# Altium PCB L-LRMAM36-FANN4-DK01_V03_位号图.PcbDoc (part 2 of 3)
Units mm, origin at the board's own origin, x right, y up, seen from the top; angles counter-clockwise.
Board outline 54 x 90 mm, 4 copper layers (Top Layer, GND, VCC, Bottom Layer), stack 1.59 mm thick; 276 components, 168 nets, 833 pads, 804 vias.
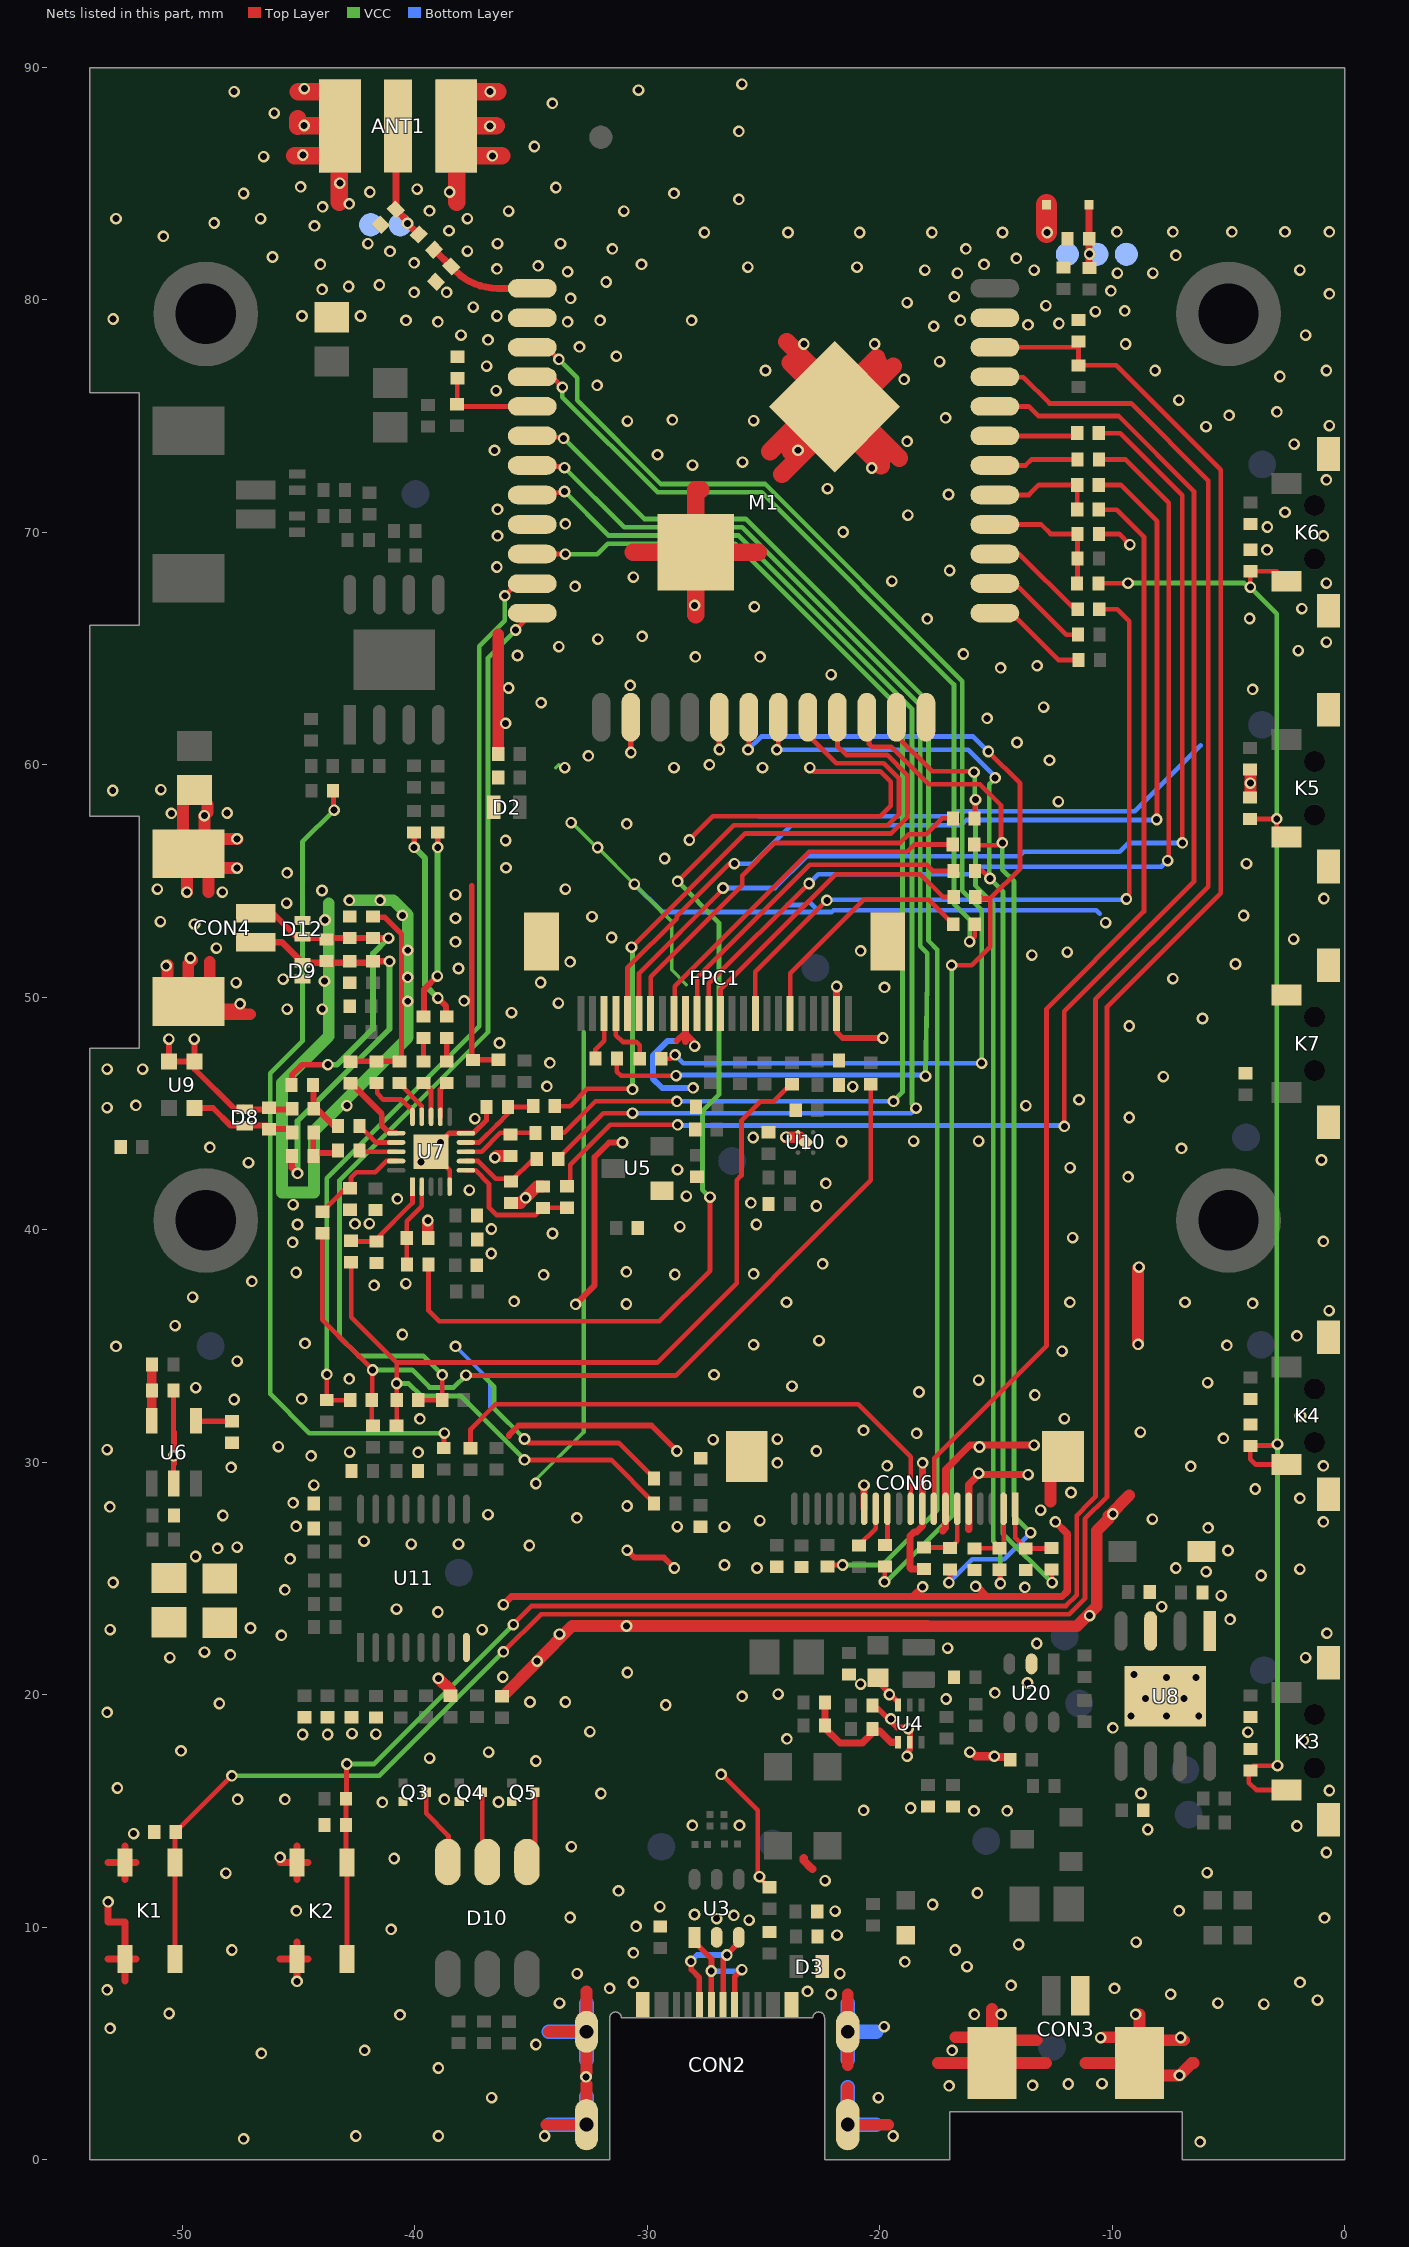
[diagram p4: the nets of this part, all layers, seen from the top]

## Via types
v1: diameter 0.5, hole 0.3, Top Layer to Bottom Layer, tented both sides, 804 vias

## Nets (pads, with @x,y where several pads share a name; then routed paths per layer and width w, separated by ;. In a path a pad name is that pad's centre, name@x,y a point inside that pad or via, vN(x,y) a via of type N, cw(c..) or ccw(c..) an arc to the next point about the centre after c; other vN are vias at no path point) (continued)
AUD_N: C57.1 R51.2 | length 8.2
  Top Layer w0.254: R51.2@-39.631,49.169 -39.606,49.194 -39.606,50.348 v1@-39.04,50.913 ; v1(-39.019,56.455) C57.1@-39.019,57.09
  VCC w0.254: v1(-39.032,50.913) -39.032,56.441 v1(-39.019,56.455)
AUD_P: C58.1 R54.2 | length 8.5
  Top Layer w0.254: v1(-40.032,56.449) C58.1@-40.032,57.084 ; v1(-39.016,49.972) -38.656,49.612 -38.656,49.194 R54.2@-38.631,49.169
  VCC w0.254: v1(-40.032,56.449) -39.562,55.979 -39.562,50.518 v1(-39.016,49.972)
BOOT: C23.2 K2.3 K2.4 M1.33 R37.2 | length 104.2
  Top Layer w0.203: K2.3@-42.925,8.625 K2.4@-42.925,12.775 -42.964,12.814 R37.2@-42.964,15.523 -42.945,15.542 -42.945,16.999 v1(-42.926,17.018) ; v1@-35.776,23.025 -34.982,23.819 -11.993,23.819 -11.532,24.281 -11.532,27.706 -11.237,28.001 ; M1.33@-15.05,76.69 -15.034,76.674 -13.826,76.674 -12.7,75.548 -9.187,75.548 -5.871,72.232 -5.871,54.765 -10.726,49.91 -10.726,28.517 -11.239,28.004
  VCC w0.203: v1(-42.926,17.018) -41.757,17.018 v1(-35.763,23.012)
Camera_RST: FPC1.6 R17.1 | length 10.5
  Top Layer w0.203: FPC1.6@-23.858,49.3 -23.858,51.038 -20.694,54.202 -17.898,54.202 R17.1@-16.839,53.143
CHIP_PU: C19.2 C22.2 K1.3 K1.4 M1.34 R20.1 | length 112.3
  Top Layer w0.203: K1.3@-50.325,8.625 K1.4@-50.325,12.775 -50.325,14.064 C19.2@-50.292,14.097 v1(-47.879,16.51) ; v1(-36.195,21.844) -34.576,23.463 -11.846,23.463 -11.176,24.133 -11.176,27.559 -10.227,28.508 -10.227,49.59 -5.334,54.483 -5.334,72.688 -9.832,77.186 R20.1@-11.463,77.186 -11.456,77.194 C22.2@-11.456,78.214 ; M1.34@-15.05,77.96 C22.2@-11.528,77.96
  VCC w0.203: v1(-47.879,16.51) -41.529,16.51 v1(-36.195,21.844)
CODEC_I2S0_BCLK: C51.2 R45.1 U7.6 | length 5.9
  Top Layer w0.203: U7.6@-37.806,42.556 -37.393,42.556 -36.815,41.979 -36.815,41.026 -36.81,41.02 -36.81,40.946 -36.499,40.636 -34.799,40.636 C51.2@-34.492,40.942 -34.488,40.947 R45.1@-33.45,40.947
CODEC_I2S0_DIN: C54.2 R47.1 U7.7 | length 3.8
  Top Layer w0.203: U7.7@-37.806,42.956 -37.285,42.956 -36.521,42.193 -36.044,42.193 C54.2@-35.918,42.067 ; C54.2@-35.873,42.077 -34.916,43.035 R47.1@-34.763,43.035
CODEC_I2S0_DOUT: C56.2 R49.1 U7.9 | length 3.7
  Top Layer w0.203: U7.9@-37.806,43.756 -37.238,43.756 -36.47,44.525 -36.459,44.525 -35.998,44.985 C56.2@-35.998,45.283 -34.944,45.283 R49.1@-34.91,45.316
CODEC_I2S0_LRCK: C52.2 R48.1 U7.8 | length 3.3
  Top Layer w0.203: U7.8@-37.806,43.356 -37.135,43.356 -36.322,44.169 -35.886,44.169 R48.1@-34.818,44.169
CODEC_I2S0_MCLK: C50.2 R43.1 U7.2 | length 3.6
  Top Layer w0.203: R43.1@-40.337,38.513 -40.353,38.529 C50.2@-40.353,39.638 -40.353,40.371 -39.706,41.018 U7.2@-39.706,41.857
D0: FPC1.19 R106.1 | length 47.1
  Top Layer w0.203: FPC1.19@-30.358,49.3 -30.358,51.033 -26.747,54.643 v1(-26.747,54.705) ; R106.1@-10.58,74.269 -9.657,74.269 -6.985,71.597 v1(-6.985,56.642)
  Bottom Layer w0.203: v1(-26.747,54.705) -24.513,54.705 -23.152,56.066 -14.011,56.066 -13.816,56.261 -9.682,56.261 -9.301,56.642 v1(-6.985,56.642)
D1: FPC1.21 R107.1 | length 2.7
  Top Layer w0.203: FPC1.21@-31.358,49.3 -31.358,48.376 -31.063,48.081 -30.477,48.081 -30.328,47.932 R107.1@-30.328,47.358
D2: FPC1.22 R108.1 | length 2.1
  Top Layer w0.203: R108.1@-32.238,47.362 -32.238,47.75 -31.858,48.131 FPC1.22@-31.858,49.3
D2_N: CON2.A7 CON2.B7 U3.3 | length 6.5
  Top Layer w0.241: v1(-28.13,8.531) -28.109,8.51 -28.109,8.169 -27.769,7.829 CON2.B7@-27.769,7.078 ; CON2.A7@-26.75,6.65 -26.73,6.67 -26.73,8.651 v1(-26.58,8.802) -26.58,8.827 -26.071,9.335 U3.3@-26.071,9.561
  Bottom Layer w0.241: v1(-28.13,8.531) -27.86,8.802 v1(-26.58,8.802)
D2_P: CON2.A6 CON2.B6 U3.1 | length 5.8
  Top Layer w0.241: U3.1@-27.971,9.561 -27.971,9.361 -27.244,8.634 -27.244,8.182 v1@-27.247,8.178 ; v1@-27.259,8.11 v1@-27.259,8.169 ; v1(-27.253,8.11) -27.25,8.107 CON2.A6@-27.25,6.65 ; CON2.B6@-26.25,7.059 -26.25,7.865 v1@-25.943,8.172 ; v1@-25.96,8.172 v1@-25.943,8.172 ; v1(-25.937,8.172) v1@-25.943,8.172
  Bottom Layer w0.241: v1(-27.253,8.11) -25.999,8.11 v1(-25.937,8.172)
D3: FPC1.20 R109.1 | length 43.5
  Top Layer w0.203: FPC1.20@-30.858,49.3 -30.858,51.265 -28.734,53.389 -28.734,53.496 -26.483,55.747 v1(-26.256,55.747) v1@-26.312,55.69 ; R109.1@-10.585,72.041 -9.631,72.041 -8.072,70.482 -8.072,57.669 v1(-8.089,57.652)
  Bottom Layer w0.203: v1(-26.256,55.747) -25.473,55.747 -23.813,57.407 -16.497,57.407 -16.276,57.628 -8.113,57.628 v1(-8.089,57.652)
D4: FPC1.18 R16.1 | length 17.7
  Top Layer w0.203: FPC1.18@-29.858,49.3 -29.858,50.882 -25.915,54.825 -25.915,55.238 -24.511,56.642 -19.133,56.642 -18.759,57.016 -18.008,57.016 -17.324,57.7 R16.1@-16.85,57.7
D5: FPC1.16 R9.1 | length 15.7
  Top Layer w0.203: FPC1.16@-28.858,49.3 -28.825,49.333 -28.825,50.481 -23.045,56.261 -18.832,56.261 -18.521,56.571 R9.1@-16.863,56.571
D6: FPC1.14 R2.1 | length 14.7
  Top Layer w0.203: FPC1.14@-27.858,49.3 -27.858,50.861 -23.019,55.7 -17.976,55.7 -17.708,55.432 -16.834,55.432 R2.1@-16.83,55.437
D7: FPC1.12 R1.1 | length 13.5
  Top Layer w0.203: FPC1.12@-26.858,49.3 -26.858,50.331 -21.899,55.29 -18.256,55.29 -17.281,54.315 R1.1@-16.822,54.315
GND: ANT1.2 ANT1.3 ANT1.4 ANT1.5 ANT2.2 C1.1 C2.1 C8.1 C9.1 C10.1 C11.1 C12.1 C14.1 C15.1 C16.1 C17.1 C19.1 C20.1 C21.1 C22.1 C23.1 C24.1 C25.1 C26.1 C27.1 C28.1 C32.1 C33.1 C34.1 C44.2 C53.1 C55.1 C59.2 C66.1 C67.1 C68.1 C69.2 C70.1 C71.2 C74.2 C75.2 C76.2 C77.2 C78.1 C79.1 C80.1 C82.1 C83.1 C84.2 C85.1 C88.2 C89.1 C92.2 CON2.A1 CON2.A12 CON2.B1 CON2.B12 CON2.H1 CON2.H2 CON2.H3 CON2.H4 CON3.0 CON3.2 CON6.0 CON6.5 CON6.7 CON6.9 CON6.14 D2.A D3.A D6.A FPC1.2 FPC1.15 FPC1.25 FPC1.26 K1.1 K1.2 K2.1 K2.2 K3.0 K4.0 K5.0 K6.0 K7.0 K7.1 LED1.K M1.2 M1.9 M1.14 M1.17 M1.24 M1.35 Q3.E Q4.E Q5.E R3.1 R4.1 R12.1 R26.1 R28.2 R29.1 R31.1 R63.2 R66.1 R77.1 R79.1 R81.1 R85.1 R88.2 R89.1 R115.1 TP3.1 TP5.1 TP7.1 U3.2 U4.2 U4.6 U5.1 U8.0 U8.1 U8.3 U10.0 U10.2 U11.8 U20.2 | length 350.2
  Top Layer w0.2: v1(-26.825,16.575) -26.8,16.575 -25.25,15.025 -25.25,13.711 -25.248,13.708 -25.248,13.292 -25.25,13.29 -25.25,12.25 v1(-25.175,12.175) -25.189,12.175 -25.207,12.157 C12.1@-24.8,11.75
  Top Layer w0.203: v1(-28.194,56.769) -27.178,57.785 -19.983,57.785 -19.535,58.233 -19.535,59.267 -19.983,59.715 -22.851,59.715 v1(-23.014,59.878) ; C44.2@-10.574,69.933 -9.709,69.933 -9.247,69.47 v1(-9.243,69.47)
  Top Layer w0.241: M1.14@-30.715,62.05 -30.715,60.536 v1(-30.712,60.533) ; -28.739,48.128 -28.739,48.133 -28.387,48.485 -28.358,48.455 v1@-28.036,48.133 ; M1.17@-26.905,62.05 -26.905,60.663 v1(-26.902,60.66) ; FPC1.2@-21.858,49.3 -21.858,48.506 -21.6,48.248 v1(-19.868,48.248) ; v1(-21.858,50.464) v1@-21.822,50.5 ; R12.1@-20.312,19.4 -20.075,19.4 -19.264,18.589 -18.829,18.589 v1(-18.78,18.54) ; C14.1@-20.084,20.554 -19.214,19.684 U4.6@-19.214,19.552 ; v1(-18.826,17.351) -18.9,17.425 -18.8,17.525 -18.8,17.55 -18.714,17.636 U4.2@-18.714,17.952 ; -18.697,17.64 v1@-18.697,18.615 ; v1@-15.125,17.325 v1@-15.075,17.325 ; v1@-15.076,17.326 v1(-15.076,17.351) ; C1.1@-14.512,17.325 C1.1@-14.387,17.2
  Top Layer w0.254: -35.946,31.133 -35.946,31.176 -35.543,31.579 -29.827,31.579 v1(-28.73,30.481) ; v1(-33.085,36.794) -32.271,37.609 -32.271,43.131 -31.646,43.755 v1(-31.07,43.755) ; v1(-30.874,26.213) -30.555,25.894 -29.285,25.894 v1(-28.842,25.451)
  Top Layer w0.3: -53.2,8.625 K1.1@-52.475,8.625 ; v1(-53.2,11.085) -53.2,10.212 -52.475,10.212 K1.1@-52.475,8.625 ; -53.2,12.775 K1.2@-52.475,12.775 ; -52.475,7.675 K1.1@-52.475,8.4 ; -52.475,12.05 K1.2@-52.475,12.775 ; -52.475,13.5 K1.2@-52.475,12.775 ; -52.007,8.625 K1.1@-52.475,8.625 ; -52.007,12.775 K1.2@-52.475,12.775 ; -45.8,8.625 K2.1@-45.075,8.625 ; v1@-45.8,12.775 K2.2@-45.075,12.775 ; v1@-45.075,7.9 K2.1@-45.075,8.625 ; -45.075,9.35 K2.1@-45.075,8.625 ; -45.075,12.05 K2.2@-45.075,12.775 ; -45.075,13.5 K2.2@-45.075,12.775 ; -44.607,8.625 K2.1@-45.075,8.625 ; -44.607,12.775 K2.2@-45.075,12.775 ; -28.358,48.097 -28.358,48.455 FPC1.15@-28.358,49.3 ; FPC1.2@-21.858,49.3 v1(-21.858,50.464)
  Top Layer w0.305: v1(-36.195,23.876) -35.846,24.225 -15.387,24.225 ; v1(-20.683,29.015) -20.679,29.011 -20.679,28.002 CON6.14@-20.675,27.998 ; -18.542,24.257 v1(-18.161,24.638) ; v1(-18.161,29.972) -18.161,27.258 -18.425,26.994 -18.52,26.994 -18.698,26.815 -18.698,25.445 -18.662,25.408 C59.2@-18.094,25.408 ; -17.292,27.051 -17.175,27.168 CON6.7@-17.175,27.998 -17.175,29.674 -16.114,30.735 v1(-13.363,30.735) ; -16.175,27.097 CON6.5@-16.175,27.998 -16.175,29.037 -15.747,29.465 v1(-13.617,29.465) ; v1@-15.825,24.663 -15.387,24.225 ; v1(-12.446,27.432) -11.938,26.924 -11.938,24.449 -12.162,24.225 -15.387,24.225
  Top Layer w0.35: -23.275,12.975 -23.275,12.862 -22.986,12.573 -22.973,12.573 -22.9,12.5 ; v1(-16.125,17.525) -16.05,17.525 -15.876,17.351 v1(-15.076,17.351) ; v1@-15.075,17.325 C1.1@-14.512,17.325
  Top Layer w0.5: -34.359,1.5 CON2.H3@-32.62,1.5 -32.62,3.239 ; -34.232,5.5 CON2.H2@-32.62,5.5 ; v1@-32.62,3.761 CON2.H2@-32.62,5.5 ; -32.62,7.239 CON2.H2@-32.62,5.5 ; CON2.H2@-32.493,5.5 CON2.H2@-32.62,5.5 ; v1(-24.039,43.983) -23.425,43.983 U10.0@-23.196,43.754 ; CON2.H4@-21.38,1.373 CON2.H4@-21.38,1.5 ; -21.38,3.112 CON2.H4@-21.38,1.5 ; -21.38,4.064 CON2.H1@-21.38,5.5 -21.38,7.112 ; -19.641,1.5 CON2.H4@-21.38,1.5
  Top Layer w0.508: v1(-38.989,20.701) -38.468,20.18 C67.1@-38.468,20.175 ; C8.1@-36.418,60.475 -36.418,65.62 ; C68.1@-36.252,19.934 -36.244,19.943 -36.206,19.943 -34.742,21.407 v1(-34.742,21.445) -33.232,22.955 v1(-30.899,22.955) -17.959,22.955 -17.949,22.945 -11.521,22.945 -10.668,23.798 -10.668,27.051 -10.16,27.559 -10.16,27.686 -9.271,28.575 ; M1.9@-35.006,70.396 M1.9@-34.95,70.34 ; -17.502,4.15 CON3.0@-15.175,4.15 ; -16.756,5.261 CON3.0@-15.175,5.261 ; CON3.0@-15.59,5.13 CON3.0@-15.175,5.13 ; -15.175,6.477 CON3.0@-15.175,5.261 ; CON3.0@-14.429,5.261 CON3.0@-15.175,5.261 ; -13.263,5.13 CON3.0@-15.175,5.13 ; -12.848,4.15 CON3.0@-15.175,4.15 ; -12.656,28.3 -12.656,29.718 CON6.0@-12.125,30.248 ; -11.152,4.15 CON3.0@-8.825,4.15 ; v1@-10.406,5.261 CON3.0@-8.825,5.261 ; CON3.0@-9.24,5.13 CON3.0@-8.825,5.13 ; v1(-8.89,35.074) -8.89,38.352 v1(-8.853,38.389) ; v1@-8.825,6.245 CON3.0@-8.825,5.261 ; CON3.0@-8.079,5.261 CON3.0@-8.825,5.261 ; v1@-6.913,5.13 CON3.0@-8.825,5.13 ; -6.498,4.15 -6.58,4.15 v1(-7.107,3.623) -8.298,3.623 CON3.0@-8.825,4.15 ; C33.1@-4.058,58.723 v1(-4.058,59.211) R28.2@-4.058,59.712 ; CON3.0@-15.175,4.15 CON3.0@-15.175,5.13 ; CON3.0@-15.175,5.13 CON3.0@-15.175,5.261 ; CON3.0@-8.825,4.15 CON3.0@-8.825,5.13 ; CON3.0@-8.825,5.13 CON3.0@-8.825,5.261
  Top Layer w0.762: -45.171,86.203 ANT1.2@-43.36,86.203 ; -45.036,87.475 -45.036,87.783 ; -45.011,88.951 ANT1.2@-43.2,88.951 ; v1@-44.933,87.492 ANT1.2@-43.122,87.492 ; -43.255,84.198 ANT1.2@-43.255,86.009 ; ANT1.3@-38.328,87.492 -36.517,87.492 ; ANT1.3@-38.25,88.951 -36.439,88.951 ; -38.195,84.198 ANT1.3@-38.195,86.009 ; ANT1.3@-38.09,86.203 v1(-36.673,86.203) -36.279,86.203 ; -30.614,69.15 M1.2@-27.925,69.15 ; -27.925,66.461 M1.2@-27.925,69.15 ; -27.711,71.839 -27.925,71.839 M1.2@-27.925,69.15 ; -25.236,69.15 M1.2@-27.925,69.15 ; -24.723,73.482 M1.2@-22.821,75.383 ; -24.208,72.502 M1.2@-22.307,74.403 ; -24.001,78.204 M1.2@-22.1,76.302 ; -23.851,73.499 M1.2@-21.95,75.4 ; -23.851,77.301 M1.2@-21.95,75.4 ; M1.2@-22.032,75.599 -20.13,77.5 ; M1.2@-21.854,74.769 -19.952,72.868 ; M1.2@-21.742,75.141 -19.841,73.24 ; M1.2@-21.329,75.242 -19.428,77.144 ; M1.2@-21.062,75.106 -19.16,73.204 ; -20.049,77.301 M1.2@-21.95,75.4 ; v1@-12.83,82.9 v1(-12.805,82.9)
  Top Layer w0.9: v1@-12.83,82.9 ANT2.2@-12.83,84.1
  VCC w0.152: v1(-34.798,29.083) -34.798,29.239 -32.735,31.302 ; -33.94,59.874 -33.809,60.005 ; v1(-33.278,57.516) -33.245,57.516 -32.176,56.447 v1(-32.143,56.447) v1(-30.565,54.869) -28.956,53.26 -28.956,51.181 -28.321,50.546
  VCC w0.203: -32.735,31.302 -32.735,48.498
  Bottom Layer w0.152: v1(-38.254,34.986) -36.888,33.62 cw(c-37.011,33.497) -36.837,33.497 cw(c-36.993,33.34) -36.772,33.34 -36.772,32.369
  Bottom Layer w0.203: v1(-30.565,54.869) -29.367,53.671 -22.608,53.671 ; -25.224,57.785 -16.933,57.785 -16.716,58.001 -9.033,58.001 -6.2,60.834 ; -23.98,53.975 -23.213,53.975 -23.063,54.126 -22.608,53.671 ; -10.541,53.594 -10.695,53.748 -21.994,53.748 -22.071,53.671 -22.608,53.671
  Bottom Layer w0.254: -28.739,48.128 -29.124,48.128 -29.763,47.489 -29.763,46.501 -29.359,46.096 -28.038,46.096 v1(-28.033,46.101)
  Bottom Layer w0.635: -34.232,1.5 CON2.H3@-32.62,1.5 -32.62,2.71 ; -34.232,5.5 CON2.H2@-32.62,5.5 ; -32.62,4.29 CON2.H2@-32.62,5.5 ; -32.62,6.71 CON2.H2@-32.62,5.5 ; -21.38,3.112 CON2.H4@-21.38,1.5 -20.17,1.5 ; -21.38,4.29 CON2.H1@-21.38,5.5 ; -21.38,6.71 CON2.H1@-21.38,5.5 ; -20.17,5.5 CON2.H1@-21.38,5.5
  other v1: -6.223,0.762 -47.371,0.889 -42.545,1.016 -38.989,1.016 -34.417,1.016 -19.431,1.016 -36.703,2.667 -20.066,2.667 -17.018,3.175 -13.426,3.194 -11.895,3.25 -10.445,3.266 -32.639,3.556 -38.989,3.937 -46.609,4.572 -42.164,4.699 -16.891,4.699 -34.798,4.953 -10.501,5.243 -7.059,5.251 -53.113,5.649 -19.812,5.715 -40.64,6.223 -15.931,6.245 -14.783,6.245 -8.997,6.245 -50.573,6.284 -3.478,6.69 -33.782,6.731 -5.461,6.731 -1.171,6.859 -22.098,7.112 -7.493,7.112 -23.114,7.239 -53.24,7.3 -31.623,7.366 -9.906,7.366 -14.351,7.493 -30.607,7.62 -1.925,7.625 -45.076,7.664 -33.02,8.001 -21.717,8.001 -16.25,8.3 -18.923,8.509 -30.607,8.89 -47.879,9.017 -16.764,9.017 -14.025,9.25 -8.975,9.35 -21.844,9.652 -41.021,9.906 -30.48,10.033 -25.621,10.297 -27.024,10.366 -0.869,10.4 -33.326,10.414 -26.277,10.509 -27.973,10.545 -21.924,10.684 -45.1,10.7 -7.125,10.7 -29.461,10.884 -17.725,10.975 -15.808,11.469 -31.242,11.557 -22.35,12 -48.133,12.319 -5.916,12.342 -40.894,12.954 -45.8,13 -0.79,13.209 -33.274,13.462 -52.103,14.021 -8.475,14.2 -2.06,14.352 -28.067,14.379 -26.035,14.379 -15.95,15 -14.525,15 -20.7,15.025 -18.675,15.125 -41.402,15.367 -36.403,15.385 -47.625,15.494 -45.593,15.494 -38.735,15.494 -32.004,15.748 -8.763,15.748 -0.663,15.876 -52.799,15.984 -34.798,17.145 -39.37,17.272 -36.83,17.526 -50.065,17.587 -1.778,18.034 -24,18.1 -44.831,18.288 -43.755,18.288 -41.678,18.3 -42.709,18.324 -4.171,18.385 -32.476,18.407 -9.975,18.575 -19.523,18.958 -9.201,19.08 -7.677,19.08 -6.28,19.08 -53.24,19.238 -29.21,19.558 -48.414,19.619 -35.052,19.685 -33.528,19.685 -17.145,19.812 -8.566,19.842 -6.915,19.842 -25.925,19.925 -19.589,20.009 -24.375,20.025 -15.05,20.075 -20.825,20.45 -13.65,20.5 -7.677,20.731 -6.407,20.731 -36.222,20.762 -9.074,20.858 -30.861,20.955 -50.546,21.59 -1.679,21.591 -47.942,21.716 -49.05,21.833 -17.081,22.004 -13.25,22.2 -45.749,22.55 -33.782,22.606 -0.767,22.643 -53.113,22.794 -37.111,22.794 -47.075,22.866 -4.933,23.241 -10.975,23.4 -39.016,23.556 -40.794,23.683 -7.872,23.784 -5.314,24.257 -45.593,24.511 -13.761,24.619 -15.878,24.663 -3.6,25.125 -5.961,25.288 -1.933,25.401 -25.286,25.451 -7.263,25.45 -26.683,25.578 -45.366,25.842 -5.025,26.2 -35.08,26.417 -40.159,26.477 -38.127,26.477 -42.191,26.604 -5.875,27.175 -45.112,27.239 -28.715,27.229 -26.683,27.229 -0.917,27.433 -25.159,27.483 -8.275,27.55 -33.033,27.61 -36.857,27.747 -9.975,27.775 -13.081,27.94 -30.874,28.118 -45.239,28.255 -1.933,28.449 -11.775,28.698 -3.85,28.85 -44.35,29.017 -15.75,29.525 -6.625,29.825 -19.685,29.845 -0.917,29.846 -24.412,29.973 -44.463,30.277 -39.864,30.425 -42.81,30.432 -22.733,30.48 -15.712,30.653 -45.874,30.668 -27.169,30.971 -24.412,30.989 -5.225,31.025 -18.415,31.242 -8.795,31.294 -20.701,31.369 -39.791,31.863 -12.065,31.877 -1.905,32.004 -44.876,32.729 -13.335,32.893 -18.316,33.021 -23.777,33.275 -5.9,33.425 -15.748,33.528 -42.826,33.589 -27.135,33.763 -12.158,34.779 -5.075,35.025 -25.428,35.053 -44.731,35.113 -22.619,35.23 -2.06,35.434 -40.54,35.494 -0.669,36.521 -30.908,36.806 -3.965,36.831 -24.016,36.881 -11.824,36.881 -6.871,36.881 -28.817,38.078 -25.428,38.101 -30.906,38.19 -22.463,38.532 -0.917,39.498 -11.703,39.664 -28.603,40.133 -25.315,40.228 -22.733,41.021 -25.549,41.161 -28.324,41.447 -22.321,41.998 -9.317,42.277 -28.705,42.59 -11.811,42.672 -1,43 -7.025,43.5 -21.645,43.798 -18.542,43.815 -15.748,43.815 -25.448,43.968 -9.271,44.831 -13.716,45.339 -11.43,45.593 -21.165,46.156 -7.803,46.587 -27.964,47.898 -9.271,48.768 -6.121,49.091 -33.827,49.747 -19.8,50.425 -34.589,50.636 -7.394,50.801 -4.699,51.435 -33.319,51.525 -13.462,51.816 -11.938,51.943 -20.827,52 -2.2,52.5 -31.54,52.575 -10.287,53.213 -32.385,53.467 -4.346,53.522 -0.9,54.25 -33.526,54.65 -36.083,55.574 -4.225,55.75 -29.255,55.97 -36.095,56.744 -30.888,57.465 -12.319,58.42 -33.555,59.878 -28.856,59.878 -25.046,59.878 -27.332,60.005 -12.7,60.198 -32.539,60.386 -14.097,60.96 -36.095,61.783 -15.385,62 -12.954,62.484 -34.571,62.672 -3.965,63.247 -35.968,63.307 -30.737,63.418 -22.098,63.881 -14.8,64.176 -13.236,64.263 -27.94,64.643 -25.146,64.643 -35.587,64.704 -16.411,64.771 -2,64.91 -33.809,65.085 -0.79,65.279 -32.131,65.405 -30.226,65.532 -17.961,66.281 -4.092,66.295 -1.844,66.723 -25.4,66.802 -27.967,66.863 -33.105,67.682 -0.79,67.819 -19.483,67.902 -30.607,68.072 -16.998,68.362 -36.476,68.514 -3.345,69.247 -36.449,69.85 -0.917,69.851 -21.581,70.016 -3.33,70.232 -33.531,70.369 -18.796,70.739 -2.568,70.867 -36.449,70.993 -17.046,71.629 -22.253,71.883 -0.79,72.264 -20.348,72.772 -28.062,72.896 -25.908,73.025 -29.566,73.341 -36.576,73.533 -23.523,73.534 -2.175,73.8 -18.824,73.915 -5.969,74.549 -0.664,74.594 -30.861,74.789 -25.428,74.804 -28.925,74.845 -17.173,74.931 -4.973,75.036 -2.921,75.184 -7.14,75.693 -36.508,76.101 -32.159,76.328 -18.951,76.582 -2.794,76.708 -24.92,76.963 -8.156,76.963 -0.79,76.963 -36.919,77.151 -17.427,77.344 -31.335,77.579 -32.921,77.979 -23.269,78.106 -20.221,78.106 -9.426,78.106 -36.856,78.28 -38.019,78.483 -1.679,78.487 -17.681,78.868 -13.624,78.932 -12.3,78.986 -39.016,79.055 -33.428,79.055 -40.386,79.121 -32.032,79.122 -28.095,79.122 -16.538,79.122 -52.986,79.182 -44.858,79.309 -42.342,79.312 -36.476,79.309 -10.733,79.498 -9.465,79.533 -37.492,79.69 -12.855,79.757 -18.824,79.884 -33.301,80.071 -16.792,80.138 -0.663,80.265 -40.032,80.325 -38.635,80.325 -10.061,80.392 -43.993,80.455 -42.85,80.582 -41.529,80.645 -31.778,80.773 -16.665,81.154 -9.779,81.153 -8.255,81.153 -33.428,81.214 -18.062,81.281 -13.363,81.281 -1.933,81.281 -36.476,81.341 -25.682,81.408 -20.983,81.408 -34.698,81.468 -44.069,81.534 -30.254,81.535 -15.522,81.535 -40.032,81.595 -14.125,81.789 -46.128,81.849 -7.267,81.916 -41.072,82.093 -37.746,82.103 -31.507,82.2 -16.302,82.2 -42.024,82.419 -36.45,82.419 -33.738,82.419 -50.827,82.738 -27.55,82.9 -23.95,82.9 -20.868,82.9 -17.762,82.9 -14.725,82.9 -9.807,82.932 -7.394,82.932 -4.854,82.932 -2.568,82.932 -0.663,82.932 -38.532,82.977 -44.323,83.185 -48.641,83.312 -52.859,83.5 -46.636,83.5 -37.746,83.5 -39.371,83.833 -35.969,83.821 -31.016,83.821 -43.969,84.008 -42.826,84.135 -26.063,84.329 -47.371,84.582 -28.857,84.583 -41.937,84.643 -38.508,84.643 -39.905,84.77 -33.937,84.837 -44.915,84.862 -43.231,85.027 -46.509,86.167 -44.821,86.237 -34.866,86.601 -26.063,87.25 -36.773,87.475 -44.768,87.506 -46.052,88.037 -34.087,88.456 -47.779,88.961 -36.761,88.963 -30.381,89.028 -44.755,89.091 -25.936,89.282
GPIO1: M1.32 R45.2 | length 62.7
  Top Layer w0.203: R45.2@-33.45,41.872 -33.321,42.001 -33.321,42.789 -31.597,44.514 v1(-28.695,44.514) ; M1.32@-15.05,75.42 -13.588,75.42 -13.179,75.011 -9.733,75.011 -6.481,71.759 -6.481,54.987 -12.065,49.403 v1(-12.065,44.45)
  Bottom Layer w0.203: v1(-28.695,44.514) -28.668,44.487 -12.102,44.487 v1(-12.065,44.45)
GPIO2: M1.31 R106.2 | length 3.6
  Top Layer w0.203: M1.31@-15.05,74.15 -11.624,74.15 R106.2@-11.505,74.269
GPIO3: M1.30 R104.2 | length 3.7
  Top Layer w0.203: M1.30@-15.05,72.88 -13.734,72.88 -13.481,73.133 R104.2@-11.497,73.133
GPIO4: M1.29 R76.2 R109.2 | length 4.8
  Top Layer w0.203: M1.29@-15.05,71.61 -13.586,71.61 -13.155,72.041 R109.2@-11.51,72.041 -11.51,70.983 R76.2@-11.507,70.98
GPIO5: C44.1 M1.28 R50.1 R52.2 | length 5.9
  Top Layer w0.203: M1.28@-15.05,70.34 -13.063,70.34 -12.656,69.933 C44.1@-11.499,69.933 -11.499,67.817 R52.2@-11.514,67.803
GPIO6: M1.27 R102.2 | length 4.5
  Top Layer w0.203: M1.27@-15.05,69.07 -13.998,69.07 -11.623,66.695 R102.2@-11.485,66.695
GPIO7: M1.26 R99.2 | length 4.5
  Top Layer w0.203: M1.26@-15.05,67.8 -14.171,67.8 -11.971,65.6 R99.2@-11.477,65.6
GPIO8: M1.25 R105.2 | length 4.4
  Top Layer w0.203: M1.25@-15.05,66.53 -14.333,66.53 -12.317,64.514 R105.2@-11.451,64.514
GPIO9: M1.3 R107.2 | length 55.8
  Top Layer w0.203: M1.3@-34.95,77.96 -34.312,77.96 -33.811,77.459 v1(-33.811,77.447) ; R107.2@-29.403,47.358 -28.979,47.358 v1(-28.809,47.528)
  VCC w0.203: v1(-33.811,77.447) -33.023,76.659 -33.023,75.69 -29.415,72.082 -24.94,72.082 -16.451,63.594 -16.451,54.586 -15.621,53.756 v1(-15.621,47.168)
  Bottom Layer w0.203: v1(-28.809,47.528) -28.449,47.168 v1(-15.621,47.168)
GPIO10: M1.4 R17.2 | length 36
  Top Layer w0.203: M1.4@-34.95,76.69 -34.103,76.69 v1(-33.658,76.245) ; v1(-16.133,52.394) -15.914,52.613 R17.2@-15.914,53.143
  VCC w0.203: v1(-33.658,76.245) -33.658,75.822 -29.563,71.727 -25.087,71.727 -16.813,63.453 -16.813,54.024 -16.133,53.343 v1(-16.133,52.394)
GPIO11: C92.1 M1.5 R113.2 | length 4.6
  Top Layer w0.203: C92.1@-38.176,76.629 -38.176,75.532 R113.2@-38.197,75.511 -38.106,75.42 M1.5@-34.95,75.42 M1.5@-34.836,75.306
GPIO12: M1.6 R57.2 | length 62.4
  Top Layer w0.203: M1.6@-34.95,74.15 -34.897,74.097 -33.653,74.097 v1(-33.599,74.043) ; R57.2@-22.261,25.509 -22.19,25.581 v1(-21.601,25.581)
  VCC w0.203: v1(-33.599,74.043) -30.134,70.578 -25.778,70.578 -17.907,62.707 -17.907,52.429 -17.53,52.052 -17.53,27.936 -19.885,25.581 v1(-21.601,25.581)
GPIO13: M1.7 R108.2 | length 51
  Top Layer w0.203: M1.7@-34.95,72.88 -34.904,72.834 -33.612,72.834 v1(-33.566,72.788) ; R108.2@-31.313,47.362 -31.313,46.805 -31.134,46.626 -28.766,46.626 v1(-28.763,46.629)
  VCC w0.203: v1(-33.566,72.788) -31,70.222 -25.925,70.222 -18.263,62.56 -18.263,52.192 -17.957,51.887 -17.957,50.742 ; v1(-18.034,46.609) -17.957,50.746
  Bottom Layer w0.203: v1(-28.763,46.629) -28.731,46.66 -18.085,46.66 v1(-18.034,46.609)
GPIO14: M1.8 R47.2 | length 53.8
  Top Layer w0.203: M1.8@-34.95,71.61 -34.855,71.705 -33.623,71.705 v1(-33.566,71.762) ; R47.2@-33.838,43.035 -33.838,43.073 -31.893,45.018 v1(-30.641,45.018)
  VCC w0.203: v1(-33.566,71.762) -31.671,69.867 -26.072,69.867 -18.618,62.413 -18.618,45.405 v1(-18.443,45.23)
  Bottom Layer w0.203: v1(-30.641,45.018) -18.655,45.018 v1(-18.443,45.23)
GPIO15: M1.10 R48.2 | length 51.1
  Top Layer w0.203: M1.10@-34.95,69.07 -34.947,69.067 -33.53,69.067 v1(-33.526,69.063) ; R48.2@-33.893,44.169 -33.587,44.169 -32.232,45.523 v1(-28.734,45.523)
  VCC w0.203: v1(-33.526,69.063) -32.156,69.063 -31.708,69.511 -26.219,69.511 -19.026,62.318 -19.026,45.91 v1(-19.413,45.523)
  Bottom Layer w0.203: v1@-28.722,45.523 v1(-19.413,45.523)
GPIO16: M1.11 R33.1 R39.2 | length 40.2
  Top Layer w0.203: R33.1@-43.793,32.677 -43.792,32.678 -43.792,33.782 v1(-43.791,33.783) ; R33.1@-43.783,32.668 R39.2@-42.78,32.668 ; v1(-36.135,67.275) -36.13,67.275 -35.605,67.8 M1.11@-34.95,67.8
  VCC w0.203: v1(-43.791,33.783) -43.791,42.211 -37.238,48.765 -37.238,65.096 -36.135,66.199 v1(-36.135,67.275)
GPIO18: M1.12 R34.1 R40.2 | length 41.8
  Top Layer w0.203: R40.2@-39.853,32.668 R34.1@-38.822,32.668 R34.1@-38.822,32.668 -38.823,33.754 v1(-38.825,33.755) ; v1(-35.668,65.8) -35.668,65.812 M1.12@-34.95,66.53
  VCC w0.203: v1(-38.825,33.755) -39.642,34.572 -42.427,34.572 -43.249,35.394 -43.249,42.115 -36.857,48.508 -36.857,64.612 v1(-35.668,65.8)
GPIO43: M1.23 R16.2 R70.2 | length 41.6
  Top Layer w0.203: M1.23@-19.285,62.05 -19.285,61.257 -17.751,59.723 -15.986,59.723 v1(-15.947,59.685) ; R16.2@-15.925,57.7 -15.905,57.72 -15.905,58.485 v1(-15.885,58.505) ; R70.2@-14.848,25.374 -14.832,25.357 -14.832,24.796 v1(-14.815,24.78)
  VCC w0.203: v1(-15.947,59.685) -15.916,59.653 -15.916,58.536 v1(-15.885,58.505) ; v1@-15.916,58.505 -15.885,58.474 -15.885,54.796 -15.117,54.028 -15.117,26.595 -14.815,26.293 v1(-14.815,24.78)
GPIO44: M1.22 R9.2 R74.2 | length 46.1
  Top Layer w0.203: M1.22@-20.555,62.05 -20.464,61.959 -20.464,60.901 -20.345,60.782 -19.516,60.782 -17.895,59.161 -15.692,59.161 -14.788,58.257 v1@-14.788,56.586 ; v1(-17.031,24.816) -16.986,24.862 -16.986,25.373 R74.2@-16.976,25.383 ; R9.2@-15.938,56.571 -15.907,56.539 -14.835,56.539 v1@-14.788,56.586 ; v1@-14.788,56.571 v1@-14.788,56.586 ; v1(-14.732,56.642) v1@-14.788,56.586
  VCC w0.203: v1(-14.732,56.642) -14.732,55.497 -14.224,54.989 -14.224,27.686 v1(-13.509,26.971)
  Bottom Layer w0.203: v1(-17.031,24.816) -16.018,25.83 -14.651,25.83 v1(-13.509,26.971)
GPIO45: M1.21 R49.2 | length 30.5
  Top Layer w0.203: R49.2@-33.985,45.316 -33.328,45.316 -32.579,46.066 -30.667,46.066 v1(-30.641,46.04) ; v1(-30.681,52.155) -25.788,57.048 -19.714,57.048 -19.511,57.048 -18.824,57.736 -18.824,57.939 -18.824,59.562 -19.688,60.426 -21.441,60.426 -21.825,60.81 M1.21@-21.825,62.05
  VCC w0.203: v1(-30.681,52.155) -30.641,52.115 v1(-30.641,46.04)
GPIO46: M1.20 R43.2 | length 50.8
  Top Layer w0.203: R43.2@-39.412,38.513 -39.412,36.516 -38.964,36.068 -29.481,36.068 -27.305,38.244 v1(-27.305,41.402) ; v1(-28.702,54.991) -26.289,57.404 -19.658,57.404 -19.179,57.883 -19.179,59.414 -19.836,60.071 -21.868,60.071 -23.095,61.298 M1.20@-23.095,62.05
  VCC w0.203: v1(-28.702,54.991) -26.92,53.209 -26.92,45.81 -27.63,45.1 -27.63,41.727 v1(-27.305,41.402)
GPIO47: M1.18 R1.2 R65.2 | length 52.8
  Top Layer w0.203: v1(-25.674,60.65) -25.635,60.688 M1.18@-25.635,62.05 ; v1(-19.801,24.855) -19.792,24.863 -19.792,25.503 R65.2@-19.784,25.512 ; v1(-16.912,51.379) -16.054,51.379 -15.248,52.184 -15.248,54.253 ; R1.2@-15.897,54.315 -15.834,54.253 -15.248,54.253 ; v1(-15.331,60.573) -13.97,59.212 -13.97,55.531 -15.248,54.253
  VCC w0.203: v1(-19.801,24.855) -19.722,24.855 -16.912,27.665 v1(-16.912,51.379)
  Bottom Layer w0.203: v1(-25.674,60.65) -25.104,61.219 -15.977,61.219 v1(-15.331,60.573)
GPIO48: M1.19 R2.2 R68.2 | length 48.6
  Top Layer w0.203: v1(-24.435,60.65) -24.365,60.719 M1.19@-24.365,62.05 ; R2.2@-15.905,55.437 -15.584,55.437 v1(-15.259,55.112) ; R68.2@-12.615,25.38 -12.61,25.375 -12.61,24.84 v1(-12.586,24.816)
  VCC w0.203: v1(-15.037,59.439) -15.037,59.426 -15.292,59.171 -15.292,55.145 -14.703,54.555 -14.703,26.933 v1(-12.586,24.816)
  Bottom Layer w0.203: v1(-24.435,60.65) -16.2,60.65 -15.037,59.487 v1(-15.037,59.439)
HSYNC: FPC1.9 R102.1 | length 32.6
  Top Layer w0.203: FPC1.9@-25.358,49.3 -25.358,51.096 v1(-22.279,54.175) ; R102.1@-10.56,66.695 -9.781,66.695 -9.266,66.179 -9.266,54.442 -9.398,54.309 v1(-9.398,54.229)
  Bottom Layer w0.203: v1(-22.279,54.175) -22.252,54.202 -9.425,54.202 v1(-9.398,54.229)
I2C0_SCL: R40.1 R44.1 R84.2 R100.1 R111.1 | length 46.9
  Top Layer w0.203: R44.1@-42.744,38.601 -42.744,36.243 -40.786,34.285 ; R84.2@-40.786,31.568 -40.786,32.59 R40.1@-40.778,32.598 ; R40.1@-40.778,32.668 -40.782,32.671 -40.782,33.38 v1(-40.786,33.384) -40.786,34.285 ; v1(-35.285,30.099) -31.557,30.099 -29.72,28.262 R100.1@-29.72,28.224 ; R111.1@-23.786,46.259 -23.823,46.259 -24.559,45.523 -25.115,45.523 -25.952,44.687 -25.952,42.338 -26.162,42.128 -26.162,37.696 -29.573,34.285 -40.786,34.285
  VCC w0.203: v1(-40.786,33.384) -40.262,33.384 -39.73,32.852 -38.037,32.852 v1(-35.285,30.099)
I2C0_SDA: R39.1 R42.1 R83.2 R98.1 R110.1 | length 49.3
  Top Layer w0.203: R42.1@-43.986,39.85 -43.986,36.131 v1(-41.823,33.968) -41.839,33.952 -41.839,32.684 R39.1@-41.855,32.668 -41.855,31.612 R83.2@-41.811,31.568 ; v1(-37.803,33.745) -37.785,33.727 -28.789,33.727 -20.391,42.124 R110.1@-20.391,46.259 ; v1(-35.285,30.999) -35.114,30.829 -31.23,30.829 -29.908,29.506 -29.871,29.506 -29.71,29.346 R98.1@-29.71,29.308
  VCC w0.203: v1(-41.823,33.968) -40.122,33.968 -39.369,33.215 -38.333,33.215 v1(-37.803,33.745) -37.085,33.745 -36.588,33.248 -36.588,32.303 v1(-35.285,30.999)
KEY_ADC: C28.2 C32.2 C33.2 C34.2 K3.2 K4.2 K5.2 K6.2 R52.1 | length 69.6
  Top Layer w0.203: R52.1@-10.589,67.803 -10.58,67.812 -9.333,67.812 v1(-9.324,67.821) ; C28.2@-4.128,16.696 C28.2@-4.074,16.749 ; C33.2@-4.068,57.675 -3.827,57.675 v1(-2.925,57.675) ; C28.2@-4.064,16.739 C28.2@-4.128,16.739 ; C32.2@-4.064,30.7 -4.064,30.138 -3.826,29.9 K4.2@-2.5,29.9 ; v1(-4.064,67.645) -4.064,68.25 -4.14,68.326 C34.2@-4.064,68.326 -2.926,68.326 K6.2@-2.5,67.9 ; C32.2@-3.986,30.598 -3.86,30.723 -2.949,30.723 v1(-2.892,30.78) ; v1(-2.925,57.675) -2.925,57.325 K5.2@-2.5,56.9 ; v1(-2.892,16.943) -3.923,16.943 C28.2@-4.128,16.739 ; K3.2@-2.5,15.9 -3.81,15.9 -4.128,16.218 C28.2@-4.128,16.739
  VCC w0.203: v1(-9.324,67.821) -4.32,67.821 -4.144,67.645 v1(-4.064,67.645) -2.923,66.504 v1@-2.923,57.675 ; v1(-2.925,57.675) -2.925,30.813 v1(-2.892,30.78) v1(-2.892,16.943)
LCD_CLK: C59.1 CON6.6 R74.1 | length 2.9
  Top Layer w0.203: C59.1@-18.094,26.333 -17.001,26.333 R74.1@-16.976,26.308 -16.675,26.608 CON6.6@-16.675,27.998
LCD_CS1: CON6.12 R65.1 | length 1.7
  Top Layer w0.203: R65.1@-19.778,26.314 -19.675,26.417 CON6.12@-19.675,27.998
LCD_D0: C75.1 CON6.1 R68.1 | length 3
  Top Layer w0.203: CON6.1@-14.175,27.998 -14.175,26.741 C75.1@-13.724,26.289 -12.631,26.289 R68.1@-12.615,26.305
LCD_D1: C74.1 CON6.2 R70.1 | length 2.9
  Top Layer w0.203: C74.1@-15.926,26.292 -15.919,26.299 R70.1@-14.848,26.299 -14.675,26.471 CON6.2@-14.675,27.998
LCD_LED: CON6.10 R60.1 | length 23.4
  Top Layer w0.203: R60.1@-37.609,30.603 -37.609,31.416 -36.534,32.49 -20.933,32.49 -18.675,30.232 CON6.10@-18.675,27.998
LCD_RST: CON6.13 R67.1 | length 1.9
  Top Layer w0.203: R67.1@-20.899,26.421 -20.175,27.145 CON6.13@-20.175,27.998
LCD_TE: CON6.8 R76.1 | length 48
  Top Layer w0.203: CON6.8@-17.675,27.998 -17.657,28.017 -17.657,30.181 -12.827,35.011 -12.827,49.508 -8.64,53.695 -8.64,69.805 -9.815,70.98 R76.1@-10.582,70.98
LED_B: D10.4 Q5.C | length 3.2
  Top Layer w0.203: D10.4@-35.182,12.8 -34.837,13.144 Q5.C@-34.837,15.854
LED_G: D10.6 Q3.C | length 3.4
  Top Layer w0.203: Q3.C@-39.513,15.795 -39.513,14.889 -38.559,13.935 -38.559,12.823 D10.6@-38.582,12.8
LED_R: D10.5 Q4.C | length 3.1
  Top Layer w0.203: Q4.C@-37.1,15.8 -37.1,13.018 D10.5@-36.882,12.8
LoRa_RF: C20.2 M1.1 R27.1 | length 4.8
  Top Layer w0.305: R27.1@-39.174,82.17 C20.2@-38.441,81.437 -38.248,81.244 ccw(c-36.452,83.04) -36.452,80.5 M1.1@-34.95,80.5
MCLK: FPC1.13 R104.1 | length 42.4
  Top Layer w0.203: FPC1.13@-27.358,49.3 -27.358,50.598 -23.061,54.895 v1(-23.039,54.895) ; R104.1@-10.572,73.133 -9.419,73.133 -7.568,71.282 -7.568,55.932 v1(-7.62,55.88)
  Bottom Layer w0.203: v1(-23.039,54.895) -22.644,55.29 -16.014,55.29 -15.686,55.618 -7.887,55.618 -7.626,55.88 v1(-7.62,55.88)
MIC_N: C29.1 C30.1 C31.1 C37.1 C38.1 C39.1 C40.1 C41.1 C45.1 C46.1 C47.1 C48.1 C49.1 C50.1 C51.1 C52.1 C54.1 C56.1 C60.2 C61.1 C63.1 C64.1 C65.1 CON4.0 D8.A D9.K D12.A R35.1 R41.2 R63.1 R66.2 R90.1 R93.1 U6.2 U7.0 U7.5 U7.10 U9.2 U9.3 | length 88.6
  Top Layer w0.203: U7.0@-39.306,43.356 -38.506,42.556 U7.5@-38.506,41.857
  Top Layer w0.229: U6.2@-50.383,29.095 v1(-50.383,30.272) -50.383,31.324 ; C31.1@-50.383,33.077 -50.383,31.324 ; -50.36,29.938 -50.36,31.3 -50.383,31.324 ; C38.1@-42.778,47.226 -42.76,47.244 C39.1@-41.656,47.244 C41.1@-40.656,47.244 -40.576,47.324 -40.576,49.83 -40.576,52.72 -41.294,53.439 -41.768,53.439 R93.1@-41.803,53.474 ; U7.0@-39.306,43.356 v1(-38.906,43.757) -38.506,44.157 U7.10@-37.806,44.157 -37.478,44.157 -36.923,44.711 C56.1@-36.923,45.283 ; -37.557,54.804 -37.557,47.312 C49.1@-36.4,47.312
  Top Layer w0.254: v1(-50.583,48.198) -50.581,48.197 -50.581,47.243 U9.2@-50.579,47.241 U9.3@-49.479,47.241 ; v1(-49.494,48.201) -49.487,48.194 -49.487,47.248 U9.3@-49.479,47.241 ; D8.A@-47.39,45.253 D8.A@-47.317,45.18 ; R41.2@-45.282,45.206 -45.308,45.18 D8.A@-47.317,45.18 ; U9.3@-49.479,47.241 -49.479,46.919 -47.741,45.18 D8.A@-47.317,45.18
  Top Layer w0.508: CON4.0@-50.646,49.788 v1@-50.646,51.403 ; CON4.0@-49.978,56.745 R90.1@-49.978,58.36 ; v1(-49.811,54.528) CON4.0@-49.811,56.143 ; CON4.0@-49.75,49.825 -49.75,51.44 v1@-49.581,51.61 ; CON4.0@-49.27,55.558 CON4.0@-48.878,55.558 ; CON4.0@-49.019,49.479 v1@-47.541,49.479 ; R90.1@-48.925,58.29 -48.925,57.948 v1(-49.059,57.813) -49.059,56.942 -48.925,56.808 v1@-47.636,56.808 ; -48.878,54.53 CON4.0@-48.878,55.558 ; CON4.0@-48.878,56.145 CON4.0@-48.878,55.558 ; CON4.0@-48.824,49.919 -48.824,51.534 ; CON4.0@-48.709,49.273 -47.094,49.273 ; v1(-47.655,55.558) CON4.0@-48.878,55.558 ; v1(-39.448,40.398) -39.448,39.657 C50.1@-39.428,39.638 ; v1(-36.564,43.105) -36.497,43.173 C52.1@-35.886,43.173 ; C54.1@-35.873,41.152 -35.461,41.152 v1(-35.24,41.373) -34.746,41.867 C51.1@-34.492,41.867
  VCC w0.508: -43.707,54.047 -43.707,48.321 -45.719,46.309 -45.719,41.6 -44.345,41.6 -44.345,44.234 -43.083,45.496 -40.309,48.27 v1(-40.309,49.83) v1(-40.309,50.858) v1(-40.309,52.025) -40.309,53.551 -40.931,54.174 v1(-41.498,54.174) v1(-42.818,54.174)
  other v1: -52.986,24.826 -49.431,25.943 -48.487,26.293 -47.652,26.35 -48.264,27.709 -53.126,28.083 -47.906,29.779 -53.24,30.541 -47.779,32.7 -49.43,33.208 -47.652,34.351 -52.859,34.986 -50.319,35.875 -35.732,36.92 -49.563,37.104 -41.755,37.608 -40.394,37.681 -47.017,37.78 -34.462,38.063 -45.112,38.161 -36.717,38.981 -45.257,39.46 -34.081,39.841 -36.713,40.033 -45.05,40.225 -42.581,40.254 -41.96,40.262 -45.239,41.082 -40.755,41.334 -37.656,41.707 -47.162,42.889 -39.734,42.912 -48.825,43.545 -37.423,44.783 -53.24,45.257 -52.009,45.349 -42.926,45.339 -34.324,46.167 -53.24,46.908 -51.716,46.908 -34.197,47.183 -36.361,48.035 -35.848,49.342 -45.497,49.491 -43.987,49.493 -47.519,49.718 -37.88,49.85 -47.689,50.632 -43.892,50.696 -45.672,50.784 -38.127,51.242 -50.7,51.353 -49.663,51.692 -48.541,52.115 -38.254,52.385 -49.484,53.144 -50.954,53.258 -43.87,53.324 -38.254,53.401 -40.54,53.528 -45.516,54.049 -38.254,54.417 -48.287,54.528 -43.999,54.594 -51.081,54.655 -45.497,55.355 -47.655,56.814 -50.476,57.917 -48.082,57.927 -53,58.898 -50.933,58.931
MIC_N_OUT: C62.1 C64.2 CON4.1 D12.K R46.1 R93.2 | length 14.9
  Top Layer w0.254: CON4.1@-46.85,53.625 -46.117,53.625 -45.099,52.607 D12.K@-44.839,52.607 -44.782,52.549 R93.2@-41.803,52.549 ; R46.1@-45.294,46.355 -45.294,46.656 -44.85,47.1 v1(-43.75,47.1)
  Top Layer w0.279: R93.2@-41.803,52.549 v1(-41.135,52.549)
  VCC w0.254: v1(-43.75,47.1) -43.35,47.1 -41.825,48.625 ; -41.803,48.625 -41.803,51.881 v1(-41.135,52.549)
MIC_P: C63.2 D8.K R38.2 U9.4 | length 4.6
  Top Layer w0.254: U9.4@-49.479,45.241 -48.685,45.241 -47.924,44.48 D8.K@-47.317,44.48 C63.2@-46.283,44.48 ; C63.2@-46.283,44.327 -45.435,44.327 -45.431,44.331 R38.2@-45.282,44.181
MIC_P_OUT: C62.2 C65.2 CON4.2 D9.A R32.2 R91.1 | length 17.7
  Top Layer w0.279: CON4.2@-46.85,52.375 -45.725,52.375 D9.A@-44.839,51.489 -41.864,51.489 R91.1@-41.803,51.549 v1(-41.093,51.549) ; R32.2@-45.294,43.18 -45.294,42.668 v1(-45.05,42.425)
  VCC w0.254: v1@-45.05,42.5 -45.05,44.68 -41.093,48.637 v1(-41.093,51.549)
MUTE: R69.1 R94.1 | length 35.9
  Top Layer w0.203: R94.1@-43.529,58.886 -43.501,58.858 -43.501,58.082 v1(-43.473,58.054) ; R69.1@-38.761,30.618 -38.749,30.63 -38.749,31.237 v1(-38.737,31.249)
  VCC w0.203: v1(-43.473,58.054) -44.841,56.686 -44.841,48.118 -46.227,46.731 -46.227,32.937 -44.539,31.249 v1(-38.737,31.249)
NetANT1_1: ANT1.1 C21.2 R27.2 TP4.1 | length 5.1
  Top Layer w0.305: ANT1.1@-40.725,87.475 -40.82,87.38 C21.2@-40.82,83.888 -40.318,83.386 v1(-40.318,83.294) -40.316,83.294 R27.2@-39.837,82.816
NetANT2_1: ANT2.1 C27.2 R30.2 TP6.1 | length 2.7
  Top Layer w0.305: ANT2.1@-11,84.1 -11,81.434 ccw(c-10.923,81.434) R30.2@-10.977,81.379
  other v1: -10.977,81.979
NetC13_1: C13.1 R8.1 R11.2 U4.1 | length 4.7
  Top Layer w0.305: C13.1@-22.361,19.566 -22.355,19.56 R8.1@-22.355,18.75 ; R8.1@-22.35,18.75 -22.35,18.55 -21.72,17.92 -20.755,17.92 R11.2@-20.275,18.4 ; R11.2@-20.242,18.425 -20,18.425 -19.527,17.952 U4.1@-19.275,17.952
NetC30_2: C30.2 U6.4 | length 1.6
  Top Layer w0.254: U6.4@-49.422,31.784 -49.4,31.762 C30.2@-47.879,31.762
NetC31_2: C31.2 R14.1 U6.5 | length 2.4
  Top Layer w0.406: U6.5@-51.322,31.784 -51.322,34.206 R14.1@-51.308,34.22
NetC35_1: C35.1 U7.18 | length 1.6
  Top Layer w0.203: C35.1@-42.38,43.407 -42.33,43.356 U7.18@-40.806,43.356
NetC35_2: C35.2 R32.1 R38.1 | length 2.2
  Top Layer w0.254: R38.1@-44.4,44.35 -44.375,44.325 -44.375,43.3 -43.413,43.3 C35.2@-43.305,43.407
NetC36_1: C36.1 U7.17 | length 1.9
  Top Layer w0.203: C36.1@-42.38,44.457 -41.68,43.757 U7.17@-40.806,43.757
NetC36_2: C36.2 R41.1 R46.2 | length 2.5
  Top Layer w0.254: R46.2@-44.368,46.355 -44.368,45.218 R41.1@-44.35,45.2 ; R41.1@-44.32,45.206 -44.218,45.206 -43.469,44.457 C36.2@-43.305,44.457
NetC37_2: C37.2 R42.2 U7.19 | length 4.3
  Top Layer w0.203: R42.2@-43.986,40.775 -42.975,41.786 C37.2@-42.786,41.786 -42.755,41.817 -42.755,42.234 -42.516,42.473 -41.713,42.473 -41.23,42.957 U7.19@-40.806,42.957
NetC38_2: C38.2 U7.16 | length 3.2
  Top Layer w0.254: C38.2@-42.802,46.363 -42.764,46.363 -42.629,46.228 -42.629,46.19 -41.427,44.989 -41.427,44.488 -41.096,44.157 U7.16@-40.806,44.157
NetC39_2: C39.2 U7.15 | length 2.6
  Top Layer w0.203: C39.2@-41.656,46.319 -41.623,46.286 -41.623,45.871 -41.354,45.601 -40.585,45.601 -40.139,45.155 -40.108,45.155 -40.106,45.153 U7.15@-40.106,44.856
NetC40_2: C40.2 R44.2 U7.1 | length 4.4
  Top Layer w0.203: R44.2@-42.744,39.526 -42.717,39.499 C40.2@-41.645,39.499 ; C40.2@-41.446,39.66 -41.607,39.499 C40.2@-41.645,39.499 ; U7.1@-40.106,41.857 -40.106,41.152 -41.645,39.613 C40.2@-41.645,39.499
NetC41_2: C41.2 U7.14 | length 1.9
  Top Layer w0.203: C41.2@-40.656,46.319 -40.656,46.272 -39.706,45.322 U7.14@-39.706,44.856
NetC42_1: C42.1 R51.1 | length 1
  Top Layer w0.229: C42.1@-39.631,47.244 R51.1@-39.631,48.244
NetC42_2: C42.2 U7.13 | length 1.6
  Top Layer w0.229: C42.2@-39.631,46.319 -39.306,45.994 U7.13@-39.306,44.856
NetC43_1: C43.1 R54.1 | length 1
  Top Layer w0.229: C43.1@-38.631,47.244 R54.1@-38.631,48.244
NetC43_2: C43.2 U7.12 | length 1.6
  Top Layer w0.229: U7.12@-38.906,44.856 -38.906,46.044 C43.2@-38.631,46.319